# EAGLE board VCA 2164 (EAGLE 9.6.2)
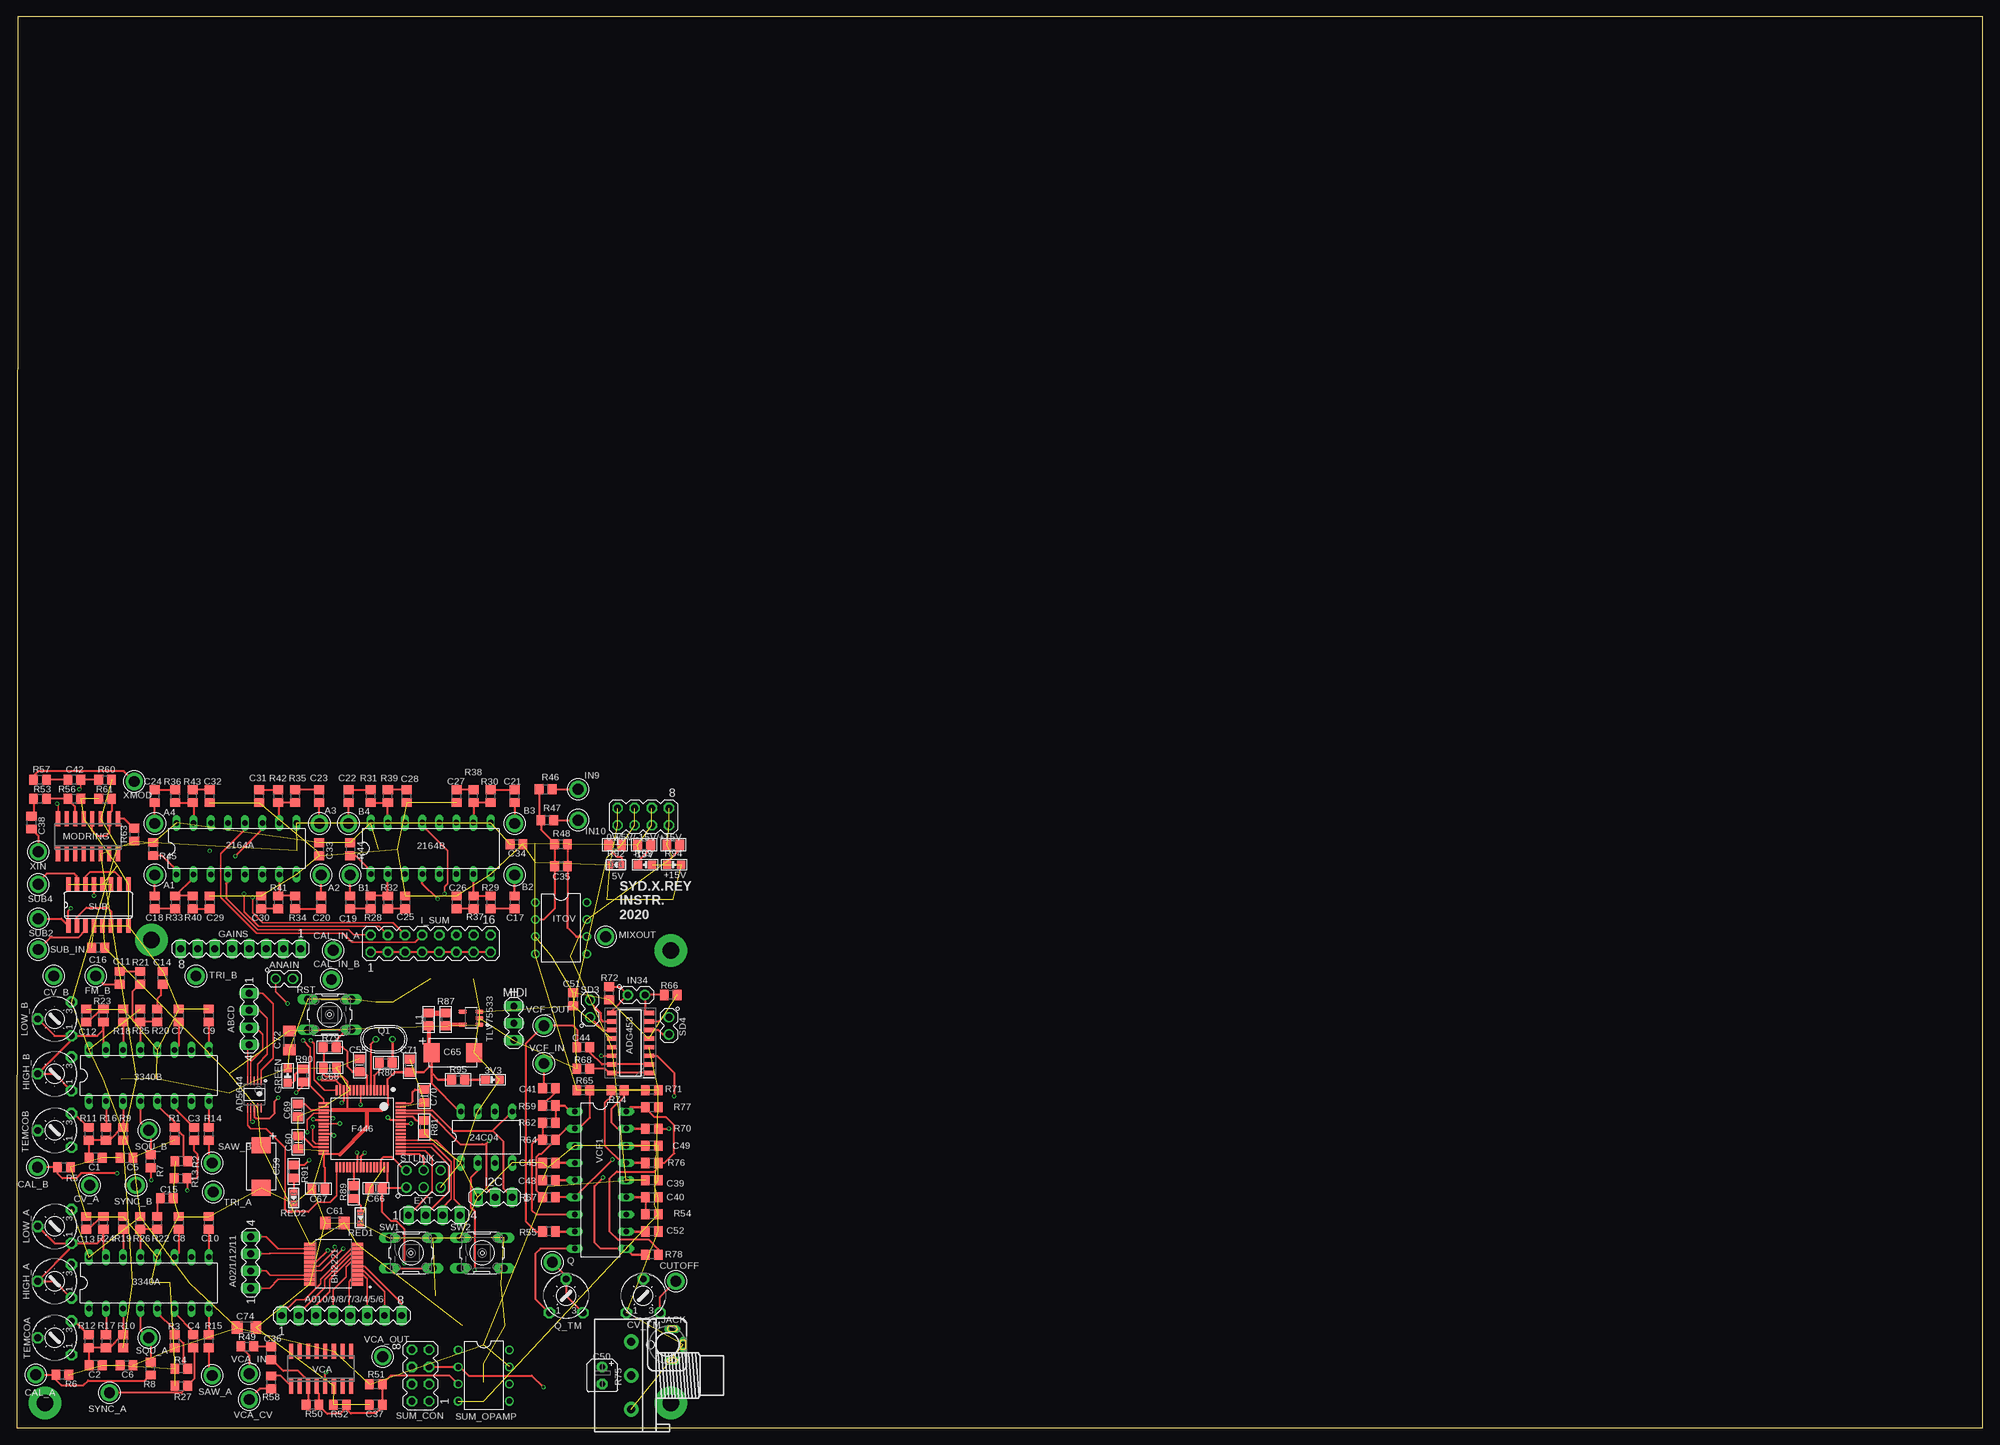
[diagram p0: board, top side]
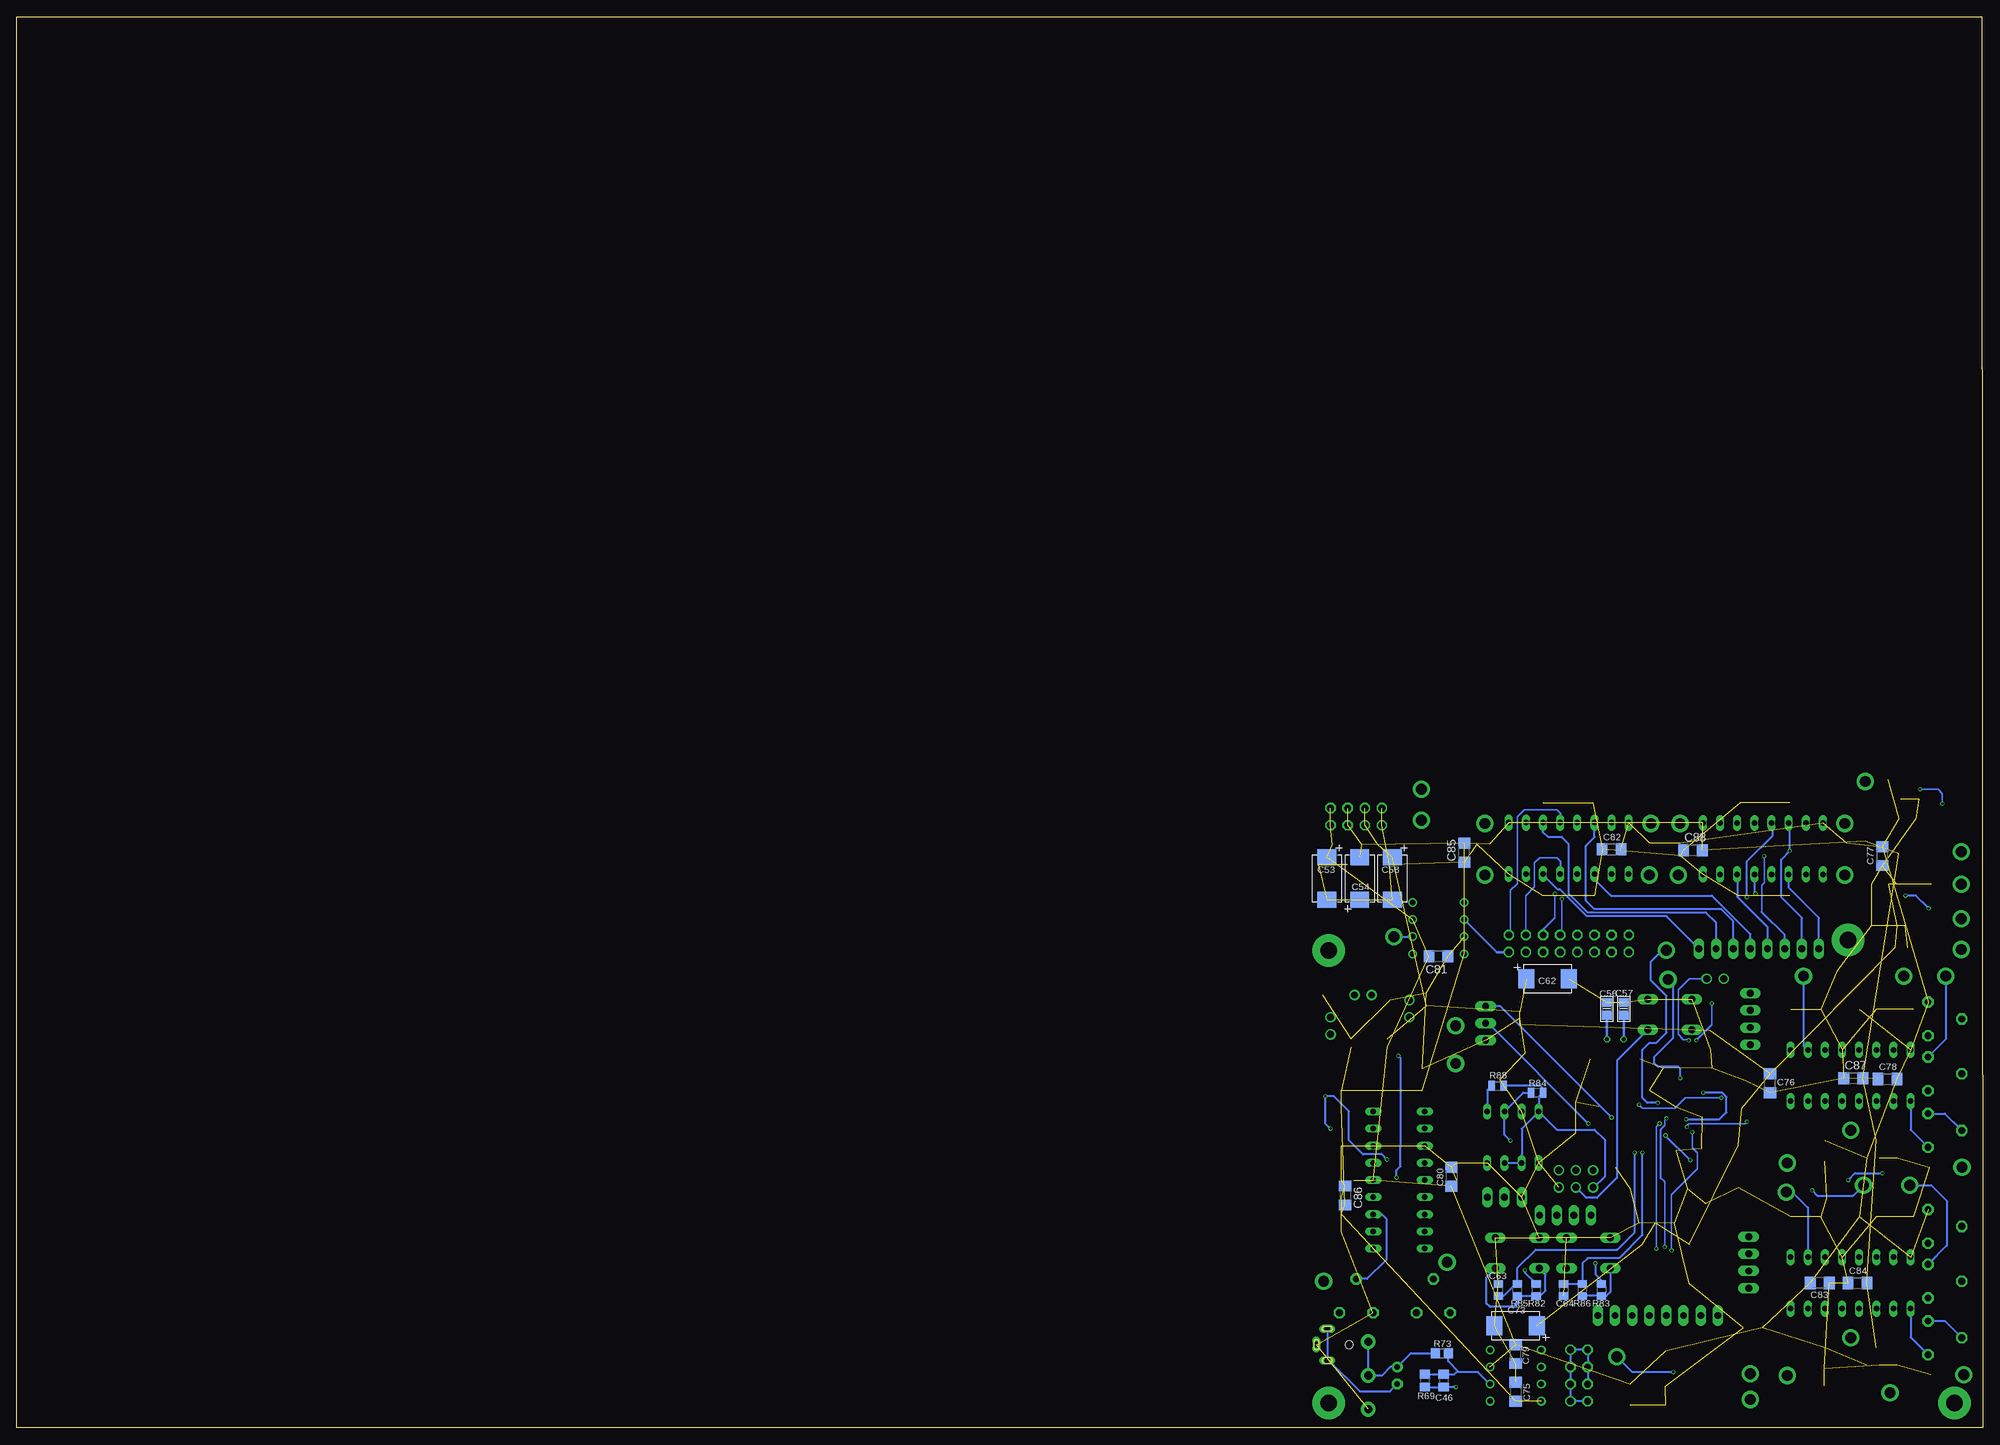
[diagram p1: board, bottom side, seen from below]

Size 291.35 x 209.06 mm. Coordinates in mm from the lower left corner, seen from the top.
Outline: 0,0 291.35,0 291.35,209.06 0.13,209.06 0,0
Copper layers (1*16): Top 0.018mm / dielectric 1.55mm / Bottom 0.018mm
Design rules "eC_2Layer_PClass6_BaseCopperO18_eCDefault": minimum track width 0.15mm, minimum drill 0.35mm, track to track 0.15mm, track to pad 0.15mm, pad to pad 0.15mm, via to via 0.15mm, smd to smd 0mil, copper to edge 0.25mm, drill to drill 0.35mm, minimum pad ring 0.175mm, minimum via ring 0.125mm, stop-mask expansion 0mil, vias tented up to drill 0.45mm, thermal gap 0.2mm

## Footprints (pad centres in the part's own frame; a part is rotated, then mirrored left to right if it is on the bottom)
MA04-2 = drill 1.016 octagon: 1 -3.81,-1.27; 2 -3.81,1.27; 3 -1.27,-1.27; 4 -1.27,1.27; 5 1.27,-1.27; 6 1.27,1.27; 7 3.81,-1.27; 8 3.81,1.27
0805-LED = smd 1.2 x 1.2: A -1.05,0; C 1.05,0
0603-LED = smd 0.8 x 1: A 0.825,0; C -0.825,0
DIL8 = drill 0.813 long: 1 -3.81,-3.81; 2 -1.27,-3.81; 3 1.27,-3.81; 4 3.81,-3.81; 5 3.81,3.81; 6 1.27,3.81; 7 -1.27,3.81; 8 -3.81,3.81
DIL16 = drill 0.813 long: 1 -8.89,-3.81; 2 -6.35,-3.81; 3 -3.81,-3.81; 4 -1.27,-3.81; 5 1.27,-3.81; 6 3.81,-3.81; 7 6.35,-3.81; 8 8.89,-3.81; 9 8.89,3.81; 10 6.35,3.81; 11 3.81,3.81; 12 1.27,3.81; 13 -1.27,3.81; 14 -3.81,3.81; 15 -6.35,3.81; 16 -8.89,3.81
TESTPOINT_63 = drill 1.6 pad 2.54: P$1 0,0
MA04-1 = drill 1.016 long: 1 -3.81,0; 2 -1.27,0; 3 1.27,0; 4 3.81,0
MA08-1 = drill 1.016 long: 1 -8.89,0; 2 -6.35,0; 3 -3.81,0; 4 -1.27,0; 5 1.27,0; 6 3.81,0; 7 6.35,0; 8 8.89,0
ANALOG_DEVICES_AD5644RBRMZ-5_0 = smd 1.45 x 0.25: 1 -2.025,1; 2 -2.025,0.5; 3 -2.025,0; 4 -2.025,-0.5; 5 -2.025,-1; 6 2.025,-1; 7 2.025,-0.5; 8 2.025,0; 9 2.025,0.5; 10 2.025,1
SOIC127P600X175-16N = smd 1.525 x 0.65: 1 -2.712,4.445; 2 -2.712,3.175; 3 -2.712,1.905; 4 -2.712,0.635; 5 -2.712,-0.635; 6 -2.712,-1.905; 7 -2.712,-3.175; 8 -2.712,-4.445; 9 2.712,-4.445; 10 2.712,-3.175; 11 2.712,-1.905; 12 2.712,-0.635; 13 2.712,0.635; 14 2.712,1.905; 15 2.712,3.175; 16 2.712,4.445
MA02-1 = drill 1.016: 1 -2.54,0; 2 0,0
SOP65P780X200-20N = smd 1.9 x 0.48: 1 -3.505,2.925; 2 -3.505,2.275; 3 -3.505,1.625; 4 -3.505,0.975; 5 -3.505,0.325; 6 -3.505,-0.325; 7 -3.505,-0.975; 8 -3.505,-1.625; 9 -3.505,-2.275; 10 -3.505,-2.925; 11 3.505,-2.925; 12 3.505,-2.275; 13 3.505,-1.625; 14 3.505,-0.975; 15 3.505,-0.325; 16 3.505,0.325; 17 3.505,0.975; 18 3.505,1.625; 19 3.505,2.275; 20 3.505,2.925
C0805 = smd 1.3 x 1.5: 1 -0.95,0; 2 0.95,0
B45181A = drill 0.813 pad 1.6: + -1.27,0 | drill 0.813 pad 1.6 octagon: - 1.27,0
CPOL2917 = smd 2.4 x 2.8: + -3.15,0; - 3.15,0
C1206 = smd 1.6 x 1.8: 1 -1.4,0; 2 1.4,0
C0805' = smd 1.016 x 1.422: 1 -0.889,0; 2 0.889,0
6MM = drill 1 pad 1.676 octagon: A -2.5,-2.5; E 2.5,-2.5; S 0,2.5
QFP50P1200X1200X160-64N = smd 1.5 x 0.3: 1 -5.7,3.75; 2 -5.7,3.25; 3 -5.7,2.75; 4 -5.7,2.25; 5 -5.7,1.75; 6 -5.7,1.25; 7 -5.7,0.75; 8 -5.7,0.25; 9 -5.7,-0.25; 10 -5.7,-0.75; 11 -5.7,-1.25; 12 -5.7,-1.75; 13 -5.7,-2.25; 14 -5.7,-2.75; 15 -5.7,-3.25; 16 -5.7,-3.75; 33 5.7,-3.75; 34 5.7,-3.25; 35 5.7,-2.75; 36 5.7,-2.25; 37 5.7,-1.75; 38 5.7,-1.25; 39 5.7,-0.75; 40 5.7,-0.25; 41 5.7,0.25; 42 5.7,0.75; 43 5.7,1.25; 44 5.7,1.75; 45 5.7,2.25; 46 5.7,2.75; 47 5.7,3.25; 48 5.7,3.75 | smd 0.3 x 1.5: 17 -3.75,-5.7; 18 -3.25,-5.7; 19 -2.75,-5.7; 20 -2.25,-5.7; 21 -1.75,-5.7; 22 -1.25,-5.7; 23 -0.75,-5.7; 24 -0.25,-5.7; 25 0.25,-5.7; 26 0.75,-5.7; 27 1.25,-5.7; 28 1.75,-5.7; 29 2.25,-5.7; 30 2.75,-5.7; 31 3.25,-5.7; 32 3.75,-5.7; 49 3.75,5.7; 50 3.25,5.7; 51 2.75,5.7; 52 2.25,5.7; 53 1.75,5.7; 54 1.25,5.7; 55 0.75,5.7; 56 0.25,5.7; 57 -0.25,5.7; 58 -0.75,5.7; 59 -1.25,5.7; 60 -1.75,5.7; 61 -2.25,5.7; 62 -2.75,5.7; 63 -3.25,5.7; 64 -3.75,5.7
HOLES_096-PAD-NS = drill 2.438 pad 4.826: B096 0,0
MA03-1 = drill 1.016 long: 1 -2.54,0; 2 0,0; 3 2.54,0
MA08-2 = drill 1.016 octagon: 1 -8.89,-1.27; 2 -8.89,1.27; 3 -6.35,-1.27; 4 -6.35,1.27; 5 -3.81,-1.27; 6 -3.81,1.27; 7 -1.27,-1.27; 8 -1.27,1.27; 9 1.27,-1.27; 10 1.27,1.27; 11 3.81,-1.27; 12 3.81,1.27; 13 6.35,-1.27; 14 6.35,1.27; 15 8.89,-1.27; 16 8.89,1.27
DIL08 = drill 0.813 pad 1.27: 1 -3.81,-3.81; 2 -1.27,-3.81; 3 1.27,-3.81; 4 3.81,-3.81; 5 3.81,3.81; 6 1.27,3.81; 7 -1.27,3.81; 8 -3.81,3.81
1502_01 = drill 0.8 pad 1.2 long: 1 0,2.35; 2 -2.35,0.75; 3 2.35,0.75 | hole 1.2: 0,-2.5
L0805 = smd 1.3 x 1.5: 1 -0.95,0; 2 0.95,0
SO16 = smd 0.6 x 2.2: 1 -4.445,-2.6; 2 -3.175,-2.6; 3 -1.905,-2.6; 4 -0.635,-2.6; 5 0.635,-2.6; 6 1.905,-2.6; 7 3.175,-2.6; 8 4.445,-2.6; 9 4.445,2.6; 10 3.175,2.6; 11 1.905,2.6; 12 0.635,2.6; 13 -0.635,2.6; 14 -1.905,2.6; 15 -3.175,2.6; 16 -4.445,2.6
Q-HC-46X = drill 0.61: 1 -1.25,0; 2 1.25,0
R0805 = smd 1.3 x 1.5: 1 -0.95,0; 2 0.95,0
3RP/1610N = drill 1.2 pad 2.184: 1 -5,0; 2 0,0; 3 5,0
R0805' = smd 1.016 x 1.422: 1 -0.889,0; 2 0.889,0
B3F-10XX = drill 1.016 long: 1 -3.251,2.261; 2 3.251,2.261; 3 -3.251,-2.261; 4 3.251,-2.261
MA03-2 = drill 1.016: 1 -2.54,-1.27; 2 -2.54,1.27; 3 0,-1.27; 4 0,1.27; 5 2.54,-1.27; 6 2.54,1.27
SO16' = smd 0.66 x 2.032: 1 -4.445,-3.073; 2 -3.175,-3.073; 3 -1.905,-3.073; 4 -0.635,-3.073; 5 0.635,-3.073; 6 1.905,-3.073; 7 3.175,-3.073; 8 4.445,-3.073; 9 4.445,3.073; 10 3.175,3.073; 11 1.905,3.073; 12 0.635,3.073; 13 -0.635,3.073; 14 -1.905,3.073; 15 -3.175,3.073; 16 -4.445,3.073
SOT95P280X145-5N = smd 1.21 x 0.59: 1 -1.255,0.95; 2 -1.255,0; 3 -1.255,-0.95; 4 1.255,-0.95; 5 1.255,0.95
DIL18 = drill 0.813 long: 1 -10.16,-3.81; 2 -7.62,-3.81; 3 -5.08,-3.81; 4 -2.54,-3.81; 5 0,-3.81; 6 2.54,-3.81; 7 5.08,-3.81; 8 7.62,-3.81; 9 10.16,-3.81; 10 10.16,3.81; 11 7.62,3.81; 12 5.08,3.81; 13 2.54,3.81; 14 0,3.81; 15 -2.54,3.81; 16 -5.08,3.81; 17 -7.62,3.81; 18 -10.16,3.81

## Placement (x,y rotation side)
0V/5V/-15V/+15V  [MA04-2]  92.84,90.55 0 top
3V3  [0805-LED]  70.48,51.56 0 top
5V  [0603-LED]  88.77,83.44 0 top
24C04  24C04AP  [DIL8]  69.6,43.05 0 top
2164A  SSM2164  [DIL16]  32.56,85.82 0 top
2164B  SSM2164  [DIL16]  61.34,85.85 0 top
3340A  CEM3340  [DIL16]  19.56,21.46 0 top
3340B  CEM3340  [DIL16]  19.56,52.2 0 top
+15V  [0805-LED]  97.41,83.44 0 top
-15V  [0805-LED]  93.09,83.44 180 top
A1  T  [TESTPOINT_63]  20.45,81.92 0 top
A2  T  [TESTPOINT_63]  45.09,81.92 0 top
A02/1/12/11  [MA04-1]  34.67,24.51 90 top
A3  T  [TESTPOINT_63]  44.83,89.54 0 top
A4  T  [TESTPOINT_63]  20.45,89.54 0 top
A010/9/8/7/3/4/5/6  [MA08-1]  48.13,16.64 0 top
ABCD  [MA04-1]  34.42,60.58 270 top
AD5644  ANALOG_DEVICES_AD5644RBRMZ-5ANALOG_DEVICES_AD5644RBRMZ-5_0_0  [ANALOG_DEVICES_AD5644RBRMZ-5_0]  35.18,49.4 270 top
ADG453  ADG453BRZ  [SOIC127P600X175-16N]  90.93,57.02 180 top
ANAIN  [MA02-1]  40.89,66.55 0 top
B1  T  [TESTPOINT_63]  49.4,81.92 0 top
B2  T  [TESTPOINT_63]  73.79,81.92 0 top
B3  T  [TESTPOINT_63]  73.79,89.54 0 top
B4  T  [TESTPOINT_63]  49.15,89.54 0 top
BH2221  BH2221FV  [SOP65P780X200-20N]  46.96,24.26 180 top
C1  100n  [C0805]  11.68,40 180 top
C2  100n  [C0805]  11.68,9.27 180 top
C3  1n  [C0805]  26.29,43.56 90 top
C4  1n  [C0805]  26.16,12.83 90 top
C5  100n  [C0805]  16.26,40 0 top
C6  100n  [C0805]  16.26,9.27 0 top
C7  1n  [C0805]  24,61.09 270 top
C8  1n  [C0805]  24,30.35 270 top
C9  100n  [C0805]  28.45,61.09 270 top
C10  100n  [C0805]  28.45,30.35 270 top
C11  100n  [C0805]  15.24,66.68 270 top
C12  10n  [C0805]  10.29,61.09 270 top
C13  10n  [C0805]  10.29,30.35 270 top
C14  10n  [C0805]  21.59,66.68 90 top
C15  10n  [C0805]  22.22,34.04 0 top
C16  100n  [C0805]  12.07,71.12 180 top
C17  470n  [C0805]  73.79,77.85 270 top
C18  470n  [C0805]  20.45,77.85 270 top
C19  470n  [C0805]  49.4,77.85 270 top
C20  470n  [C0805]  45.09,77.85 270 top
C21  470n  [C0805]  73.79,93.6 90 top
C22  470n  [C0805]  49.15,93.6 90 top
C23  470n  [C0805]  44.83,93.6 90 top
C24  470n  [C0805]  20.45,93.6 90 top
C25  560p  [C0805]  57.53,77.85 270 top
C26  560p  [C0805]  65.15,77.85 270 top
C27  560p  [C0805]  65.15,93.6 90 top
C28  560p  [C0805]  57.79,93.6 90 top
C29  560p  [C0805]  28.57,77.85 270 top
C30  560p  [C0805]  36.2,77.85 270 top
C31  560p  [C0805]  35.94,93.6 90 top
C32  560p  [C0805]  28.57,93.6 90 top
C33  100n  [C0805]  44.83,85.73 90 top
C34  100n  [C0805]  74.04,86.49 0 top
C35  100p  [C0805]  80.64,83.19 0 top
C36  4.7u  [C0805]  37.72,11.05 90 top
C37  4.7u  [C0805]  53.21,3.43 180 top
C38  4.7u  [C0805]  2.16,89.66 270 top
C39  100n  [C0805]  94.11,36.7 180 top
C40  100n  [C0805]  94.11,34.16 0 top
C41  470n  [C0805]  78.87,50.29 180 top
C42  1u  [C0805]  8.51,96.01 180 top
C43  300p  [C0805]  78.87,36.7 0 top
C44  1u  [C0805]  83.95,56.39 180 top
C45  300p  [C0805]  78.87,39.24 0 top
C46  100p  [C0805]  79.88,6.99 270 bottom
C49  300p  [C0805]  94.11,41.78 180 top
C50  22u  [B45181A]  86.74,7.75 270 top
C51  100n  [C0805]  82.42,63.5 90 top
C52  300p  [C0805]  94.11,29.08 180 top
C53  10u  [CPOL2917]  97.16,81.41 270 bottom
C54  10u  [CPOL2917]  92.33,81.41 90 bottom
C55  0.1uF  [C0805]  50.78,53.7 270 top
C56  12pF  [C0805]  55.69,62.07 270 bottom
C57  12pF  [C0805]  53.19,62.07 270 bottom
C58  10u  [CPOL2917]  87.5,81.41 270 bottom
C59  10u  [CPOL2917]  36.2,38.73 270 top
C60  2.2uF  [C0805]  41.68,42.3 90 top
C61  100n  [C1206]  47.12,30.35 0 top
C62  10u  [CPOL2917]  64.48,66.52 0 bottom
C63  100n  [C0805']  71.75,20.45 90 bottom
C64  100n  [C0805']  62.1,20.45 270 bottom
C65  100 uF  [CPOL2917]  64.61,55.57 0 top
C66  0.1uF  [C0805]  53.2,35.53 0 top
C67  0.1uF  [C0805]  44.69,35.45 0 top
C68  0.1uF  [C0805]  46.4,53.36 180 top
C69  0.1uF  [C0805]  41.6,47.02 90 top
C70  0.1uF  [C0805]  60.38,49.16 90 top
C71  1.0uF  [C0805]  58.24,53.64 270 top
C72  100n  [C1206]  40.39,57.4 90 top
C73  10u  [CPOL2917]  69.21,15.11 180 bottom
C74  1u  [C1206]  34.04,14.86 180 top
C75  1u  [C1206]  69.21,5.33 270 bottom
C76  1u  [C1206]  31.5,51.05 90 bottom
C77  1u  [C1206]  14.86,84.71 90 bottom
C78  1u  [C1206]  14.1,51.69 0 bottom
C79  1u  [C1206]  69.21,10.92 90 bottom
C80  1u  [C1206]  78.74,37.21 270 bottom
C81  1u  [C1206]  80.64,69.85 180 bottom
C82  1u  [C1206]  54.99,85.73 0 bottom
C83  1u  [C1206]  24.13,21.46 180 bottom
C84  1u  [C1206]  18.54,21.46 0 bottom
C85  1u  [C1206]  76.83,85.22 90 bottom
C86  1u  [C1206]  94.49,34.42 270 bottom
C87  1u  [C1206]  19.18,51.82 0 bottom
C88  1u  [C1206]  42.93,85.6 0 bottom
CAL_A  SYNC_IN  [TESTPOINT_63]  2.79,7.87 90 top
CAL_B  CALIB B  [TESTPOINT_63]  3.05,38.61 90 top
CAL_IN_A  [TESTPOINT_63]  46.86,70.74 0 top
CAL_IN_B  [TESTPOINT_63]  46.61,66.42 0 top
CUTOFF  [TESTPOINT_63]  97.66,21.72 0 top
CV_A  CV  [TESTPOINT_63]  10.79,35.94 90 top
CV_B  CV  [TESTPOINT_63]  5.46,66.93 90 top
CV_TM  100k  [6MM]  92.84,19.56 0 top
EXT  [MA04-1]  61.85,31.5 0 top
F446  STM32F446RCT7  [QFP50P1200X1200X160-64N]  51.18,44.32 270 top
FM_B  FMLIN  [TESTPOINT_63]  11.68,66.93 90 top
GAINS  GAIN_CTRL  [MA08-1]  33.15,70.99 180 top
GREEN  [0805-LED]  40.13,52.2 90 top
HIGH_A  100k  [6MM]  5.59,21.72 90 top
HIGH_B  100k  [6MM]  5.59,52.45 90 top
HOLE1  HOLES_MOUNT-PAD-ROUND-0.096-NS  [HOLES_096-PAD-NS]  96.9,70.74 0 top
HOLE2  HOLES_MOUNT-PAD-ROUND-0.096-NS  [HOLES_096-PAD-NS]  4.19,3.68 0 top
HOLE3  HOLES_MOUNT-PAD-ROUND-0.096-NS  [HOLES_096-PAD-NS]  96.9,3.68 0 top
HOLE4  HOLES_MOUNT-PAD-ROUND-0.096-NS  [HOLES_096-PAD-NS]  19.94,72.26 0 top
I2C  [MA03-1]  70.87,34.16 180 top
I_SUM  ITOV  [MA08-2]  61.34,71.76 0 top
IN9  [TESTPOINT_63]  83.19,94.62 0 top
IN10  [TESTPOINT_63]  83.19,90.04 0 top
IN34  IN34  [MA02-1]  93.09,64.14 0 top
ITOV  NE5534AN  [DIL08]  80.64,74.04 270 top
JACK  1502_01  [1502_01]  96.39,12.32 270 top
L1  1 uH  [L0805]  61.06,60.5 270 top
LOW_A  100k  [6MM]  5.59,29.85 90 top
LOW_B  100k  [6MM]  5.59,60.58 90 top
MIDI  [MA03-1]  73.66,59.94 270 top
MIXOUT  [TESTPOINT_63]  87.25,72.77 0 top
MODRING  LM13700M  [SO16]  10.54,87.63 0 top
Q  [TESTPOINT_63]  79.38,24.51 0 top
Q1  16MHz  [Q-HC-46X]  54.44,57.57 180 top
Q_TM  100k  [6MM]  81.41,19.56 0 top
R1  330k  [R0805]  23.37,43.56 270 top
R2  68k  [R0805]  24.38,39.5 180 top
R3  330k  [R0805]  23.37,12.83 270 top
R4  68k  [R0805]  24.38,8.76 180 top
R5  10k  [R0805]  6.98,38.61 0 top
R6  10k  [R0805]  6.73,7.87 0 top
R7  33k  [R0805]  19.81,39.5 90 top
R8  33k  [R0805]  19.81,8.76 90 top
R9  820  [R0805]  15.75,43.56 90 top
R10  820  [R0805]  15.75,12.83 90 top
R11  24k  [R0805]  10.67,43.56 270 top
R12  24k  [R0805]  10.67,12.83 270 top
R13  470k  [R0805]  24.26,36.96 0 top
R14  5.6k  [R0805]  28.45,43.56 90 top
R15  5.6k  [R0805]  28.45,12.83 90 top
R16  5.6k  [R0805]  13.21,43.56 270 top
R17  5.6k  [R0805]  13.21,12.83 270 top
R18  1.8k  [R0805]  15.75,61.09 90 top
R19  1.8k  [R0805]  15.75,30.35 90 top
R20  470  [R0805]  20.83,61.09 90 top
R21  1M  [R0805]  18.29,66.68 90 top
R22  470  [R0805]  20.83,30.35 90 top
R23  470  [R0805]  12.83,61.09 90 top
R24  470  [R0805]  12.83,30.35 90 top
R25  1.5M  [R0805]  18.29,61.09 90 top
R26  1.5M  [R0805]  18.29,30.35 90 top
R27  470k  [R0805]  24.38,6.22 0 top
R28  27k  [R0805]  52.45,77.85 270 top
R29  27k  [R0805]  70.23,77.85 270 top
R30  27k  [R0805]  70.23,93.6 90 top
R31  27k  [R0805]  52.45,93.6 90 top
R32  470  [R0805]  54.99,77.85 270 top
R33  27k  [R0805]  23.49,77.85 270 top
R34  27k  [R0805]  41.28,77.85 270 top
R35  27k  [R0805]  41.28,93.6 90 top
R36  27k  [R0805]  23.49,93.6 90 top
R37  470  [R0805]  67.69,77.85 270 top
R38  470  [R0805]  67.69,93.6 90 top
R39  470  [R0805]  54.99,93.6 90 top
R40  470  [R0805]  26.04,77.85 270 top
R41  470  [R0805]  38.73,77.85 270 top
R42  470  [R0805]  38.73,93.6 90 top
R43  470  [R0805]  26.04,93.6 90 top
R44  8.2k  [R0805]  49.4,85.73 270 top
R45  8.2k  [R0805]  20.18,85.76 270 top
R46  27k  [R0805]  78.36,94.62 0 top
R47  27k  [R0805]  78.61,90.04 0 top
R48  33K  [R0805]  80.64,86.49 0 top
R49  100k  [R0805]  34.16,12.06 0 top
R50  1k  [R0805]  43.82,3.43 0 top
R51  10k  [R0805]  53.21,6.48 0 top
R52  10k  [R0805]  47.88,3.43 180 top
R53  100k  [R0805]  3.43,93.22 0 top
R54  1.5k  [R0805]  94.11,31.62 180 top
R55  51k  [R0805]  78.87,29.08 180 top
R56  1k  [R0805]  8.51,93.22 0 top
R57  4.7k  [R0805]  3.43,96.01 180 top
R58  27k  [R0805]  37.72,6.73 90 top
R59  91k  [R0805]  78.87,47.75 0 top
R60  47k  [R0805]  13.08,96.01 0 top
R61  22k  [R0805]  13.08,93.22 0 top
R62  100k  [R0805]  78.87,45.21 0 top
R63  10k  [R0805]  17.4,87.88 90 top
R64  91k  [R0805]  78.87,42.67 180 top
R65  220k  [R0805]  83.95,50.04 0 top
R66  100k  [R0805]  96.9,64.14 180 top
R67  100k  [R0805]  78.87,34.16 0 top
R68  100k  [R0805]  83.95,53.21 0 top
R69  47k  [R0805]  82.68,6.99 270 bottom
R70  91k  [R0805]  94.11,44.32 0 top
R71  220k  [R0805]  94.11,50.04 180 top
R72  100k  [R0805]  87.76,64.39 270 top
R73  470  [R0805]  80.14,11.05 0 bottom
R74  100k  [R0805]  89.03,50.04 180 top
R75  100kB  [3RP/1610N]  91.06,7.75 90 top
R76  91k  [R0805]  94.11,39.24 180 top
R77  220k  [R0805]  94.11,47.5 180 top
R78  100k  [R0805]  94.11,25.65 180 top
R79  100k  [R0805]  46.36,56.39 0 top
R80  100  [R0805]  54.69,54.07 0 top
R81  10K  [R0805]  60.37,44.57 270 top
R82  10k  [R0805']  66.17,20.45 270 bottom
R83  10k  [R0805']  56.52,20.45 270 bottom
R84  1k  [R0805']  66.04,49.66 0 bottom
R85  10k  [R0805']  68.96,20.45 90 bottom
R86  10k  [R0805']  59.31,20.45 90 bottom
R87  1  [R0805]  63.56,60.5 270 top
R88  1k  [R0805']  71.88,50.67 0 bottom
R89  180  [R0805]  49.91,34.92 270 top
R90  1k  [R0805]  42.42,52.2 90 top
R91  180  [R0805]  41.02,37.97 270 top
R92  470  [R0805]  88.65,86.36 180 top
R93  10k  [R0805]  92.96,86.36 0 top
R94  10k  [R0805]  97.28,86.36 0 top
R95  1k  [R0805]  65.41,51.56 0 top
RED1  [0603-LED]  50.93,31.12 90 top
RED2  [0603-LED]  41.02,34.04 90 top
RST  [B3F-10XX]  46.36,61.21 180 top
SAW_A  S  [TESTPOINT_63]  28.96,7.75 270 top
SAW_B  S  [TESTPOINT_63]  28.96,39.24 270 top
SD3  SD3  [MA02-1]  84.96,63.37 90 top
SD4  SD4  [MA02-1]  96.65,58.29 270 top
SQU_A  P  [TESTPOINT_63]  19.56,13.33 270 top
SQU_B  P  [TESTPOINT_63]  19.56,44.07 270 top
STLINK  75867-331LF  [MA03-2]  60.27,36.89 0 top
SUB  4027D  [SO16']  12.07,77.47 0 top
SUB2  T  [TESTPOINT_63]  3.17,75.44 90 top
SUB4  T  [TESTPOINT_63]  3.17,80.52 90 top
SUB_IN  T  [TESTPOINT_63]  3.17,70.87 90 top
SUM_CON  [MA04-2]  59.82,7.75 90 top
SUM_OPAMP  NE5534AN  [DIL08]  69.21,7.75 270 top
SW1  [B3F-10XX]  58.42,25.91 0 top
SW2  [B3F-10XX]  68.96,25.91 0 top
SYNC_A  SYNC_IN  [TESTPOINT_63]  13.72,5.21 180 top
SYNC_B  SYNC_IN  [TESTPOINT_63]  17.65,35.94 90 top
TEMCOA  10k  [6MM]  5.59,13.33 90 top
TEMCOB  10k  [6MM]  5.59,44.07 90 top
TLV75533  TLV75533PDBVR  [SOT95P280X145-5N]  67.31,60.71 180 top
TRI_A  T  [TESTPOINT_63]  29.08,34.92 180 top
TRI_B  T  [TESTPOINT_63]  26.54,66.93 180 top
VCA  LM13700M  [SO16]  45.09,8.76 0 top
VCA_CV  [TESTPOINT_63]  34.42,4.19 0 top
VCA_IN  [TESTPOINT_63]  34.42,8 0 top
VCA_OUT  [TESTPOINT_63]  54.23,10.54 0 top
VCF1  AS3320  [DIL18]  86.49,36.7 270 top
VCF_IN  [TESTPOINT_63]  78.1,53.97 0 top
VCF_OUT  [TESTPOINT_63]  78.1,59.56 0 top
XIN  [TESTPOINT_63]  3.17,85.34 0 top
XMOD  [TESTPOINT_63]  17.4,95.76 0 top

## Library data of the parts
0V/5V/-15V/+15V A02/1/12/11 A010/9/8/7/3/4/5/6 ABCD EXT GAINS I2C I_SUM MIDI SUM_CON = con-lstb; OC_FARNELL: unknown; OC_NEWARK: unknown
3V3 5V +15V -15V GREEN RED1 RED2 = Passives
24C04 = microchip; MF: RAMTRON INTERNATIONAL CORP; MPN: FM24C04A-P; OC_FARNELL: 1094258; OC_NEWARK: 97H6447
2164A 2164B 3340A 3340B VCF1 = analog-audio-chips
A1-A4 B1-B4 C63 C64 CAL_A CAL_B CAL_IN_A CAL_IN_B CUTOFF CV_A CV_B FM_B IN9 IN10 MIXOUT Q R82-R86 R88 SAW_A SAW_B SQU_A SQU_B SUB2 SUB4 SUB_IN SYNC_A SYNC_B TRI_A TRI_B VCA_CV VCA_IN VCA_OUT VCF_IN VCF_OUT XIN XMOD = 6P1_EVB
AD5644 = Analog Devices - AD5644RBRMZ-5; CIIVA_IDS: 963927; COMPONENT_LINK_1_DESCRIPTION: Manufacturer URL; COMPONENT_LINK_1_URL: http://www.analog.com/en/index.html; COMPONENT_LINK_3_DESCRIPTION: Package Specification; COMPONENT_LINK_3_URL: http://www.analog.com/static/imported-files/packages/PKG_PDF/MSOP%28RM%29/RM_10.pdf; COMPONENT_LINK_4_DESCRIPTION: Product URL; COMPONENT_LINK_4_URL: http://www.analog.com/en/digital-to-analog-converters/da-converters/ad5644r/products/product.html; DAC_OUTPUTS: 4; DATASHEET: http://www.analog.com/static/imported-files/data_sheets/AD5624R_5644R_5664R.pdf; DATASHEET_VERSION: Rev.B; FOOTPRINT_VARIANT_NAME_0: Level C; FOOTPRINT_VARIANT_NAME_1: Level B; FOOTPRINT_VARIANT_NAME_2: Level A; IMPORTED: yes; IMPORTED_FROM: vault; IMPORT_TS: 1521855052; MAX_V: 5.5V; MF: Analog Devices; MOUNTING_TECHNOLOGY: Surface Mount; MPN: AD5644RBRMZ-5; OP_PWR_DISS: 6.6mW; PACKAGE: RM-10; PACKAGE_DESCRIPTION: 10-Lead Mini Small Outline Package [MSOP]; PACKAGE_VERSION: May-2005; PACKING: Tube; PIN_0_0_6_INSIDE_EDGE: clock; PREFIX: U; RELEASE_DATE: 1387041291; RESOLUTION_BITS: 14; ROHS: Yes; SETTLING_TIME: 3.5Âμs; SINGLE_SUPPLY: Yes; VAULT_GUID: 80AB4FD1-89D4-49BA-A3F3-5D59DB24CB1A; VAULT_REVISION: 6F701BB3-0F34-4771-8D13-1575DC664D0F
ADG453 = ADG453BRZ; DESCRIPTION: Analog Devices ADG453BRZ, Analogue SPST Switch Quad SPST, 9 V, 16-Pin SOIC; HEIGHT: 1.75mm; MANUFACTURER_NAME: Analog Devices; MANUFACTURER_PART_NUMBER: ADG453BRZ; MOUSER_PART_NUMBER: 584-ADG453BRZ; MOUSER_PRICE-STOCK: https://www.mouser.com/Search/Refine.aspx?Keyword=584-ADG453BRZ; RS_PART_NUMBER: 0412539P; RS_PRICE-STOCK: http://uk.rs-online.com/web/p/products/0412539P
ANAIN IN34 SD3 SD4 = stm32_pi_board
BH2221 = BH2221FV
C1-C16 C25-C34 C36-C46 C49 C51 C52 C61 C72 C74-C88 = rcl; SPICEPREFIX: C
C17-C24 C35 = rcl; C3: 0.47 micro; SPICEPREFIX: C
C50 = resistor
C53 C54 C58 C59 C62 C65 C73 = MyComponents; MOUSER: 581-TPSE477K010R0200
C55-C57 C60 C66-C71 = MyComponents; MOUSER: 80-C0805C104J5RAUTO
CV_TM HIGH_A HIGH_B LOW_A LOW_B Q_TM TEMCOA TEMCOB = adafruit
F446 = STM32F446RCT7; AVAILABILITY: Unavailable; DESCRIPTION: ARM® Cortex®-M4 STM32F4 Microcontroller IC 32-Bit 180MHz 256KB (256K x 8) FLASH 64-LQFP (10x10); DIGIKEY-PURCHASE-URL: https://snapeda.com/shop?store=DigiKey&id=703054; MF: STMicroelectronics; MP: STM32F446RCT7; PACKAGE: LQFP-64 STMicroelectronics; PRICE: None
HOLE1-HOLE4 = 52101-101-REV-A; BOM: EXCLUDE
ITOV SUM_OPAMP = linear
JACK = con-lumberg; OC_FARNELL: 4739747; OC_NEWARK: unknown
L1 = MyComponents; MOUSER: 963-CKP2012N1R0M-T
MODRING VCA = ota
Q1 = MyComponents; MOUSER: 520-160-20-46X
R1-R74 R76-R78 = rcl; SPICEPREFIX: R
R75 = pot
R79-R81 R87 R89-R95 = MyComponents; MOUSER: 660-RK73H2ATTDD1R00F
RST SW1 SW2 = switch-omron; MPN: B3F-1000; OC_FARNELL: 176432; OC_NEWARK: 36M3542
STLINK = MyComponents; MOUSER: 649-75867-331LF
SUB = 40xx
TLV75533 = TLV75533PDBVR; AVAILABILITY: Unavailable; DESCRIPTION: Linear Voltage Regulator IC 1 Output 500mA SOT-23-5; MF: Texas Instruments; MP: TLV75533PDBVR; PACKAGE: SOT-23 Texas Instruments; PRICE: None

## Nets
3V3: 24C04.2 24C04.3 24C04.8 C65.+ C66.2 C67.2 C68.2 C69.2 C70.2 C71.2 F446.1 F446.13 F446.19 F446.32 F446.48 F446.64 L1.2 R79.1 R82.1 R83.1 R84.2 R88.2 R95.1 STLINK.1
5V: 0V/5V/-15V/+15V.3 0V/5V/-15V/+15V.4 AD5644.9 ADG453.12 BH2221.10 BH2221.11 C16.1 C51.1 C58.+ C59.+ C61.2 C62.+ C72.2 C73.+ C76.2 R92.1 SUB.5 SUB.11 SUB.16 TLV75533.1 TLV75533.3
2164_IN1_MIXA: 2164A.2 R33.1 R40.1
2164_IN2_MIXA: 2164A.7 R34.1 R41.1
2164_IN2_MIXB: 2164B.7 R29.1 R37.1
2164_IN3_MIXA: 2164A.10 R35.1 R42.1
2164_IN3_MIXB: 2164B.10 R30.1 R38.1
2164_IN4_MIXA: 2164A.15 R36.1 R43.1
2164_IN4_MIXB: 2164B.15 R31.1 R39.1
2164_IN4_MIXB1: 2164B.2 R28.1 R32.1
2164_MODE_MIXB: 2164B.1 R44.2
2164_OUT2_MIXA: 2164A.5 I_SUM.4
2164_OUT2_MIXB: 2164B.5 I_SUM.14
2164_OUT3_MIXA: 2164A.12 I_SUM.8
2164_OUT3_MIXB: 2164B.12 I_SUM.16
2164_OUT4_MIXA: 2164A.13 I_SUM.6
2164_OUT4_MIXB: 2164B.13 I_SUM.12
+15V: 0V/5V/-15V/+15V.7 0V/5V/-15V/+15V.8 2164A.16 2164B.16 3340A.16 3340B.16 ADG453.13 C5.2 C6.2 C33.2 C39.2 C53.+ C74.2 C77.2 C78.2 C79.2 C80.2 C81.2 C82.2 C83.2 ITOV.7 LOW_A.E LOW_B.E MODRING.11 R1.2 R3.2 R25.2 R26.2 R44.1 R45.1 R51.1 R60.2 R94.1 SUM_OPAMP.7 VCA.11 VCF1.14
-15V: 0V/5V/-15V/+15V.5 0V/5V/-15V/+15V.6 2164A.9 2164B.9 ADG453.4 C34.1 C54.- C75.2 C84.2 C85.2 C86.2 C87.2 C88.2 ITOV.4 MODRING.6 R9.1 R10.1 R54.1 R63.1 R65.1 R71.1 R77.1 R93.1 SUM_OPAMP.4
AD5644_CLK: AD5644.7 F446.29
AD5644_DI: AD5644.8 F446.9
AD5644_SYNC: AD5644.6 F446.33
BH2221_AO1: A02/1/12/11.2 BH2221.18
BH2221_AO2: A02/1/12/11.1 BH2221.19
BH2221_AO3: A010/9/8/7/3/4/5/6.5 BH2221.2
BH2221_AO4: A010/9/8/7/3/4/5/6.6 BH2221.3
BH2221_AO6: A010/9/8/7/3/4/5/6.8 BH2221.5
BH2221_AO7: A010/9/8/7/3/4/5/6.4 BH2221.6
BH2221_AO8: A010/9/8/7/3/4/5/6.3 BH2221.7
BH2221_AO9: A010/9/8/7/3/4/5/6.2 BH2221.8
BH2221_AO10: A010/9/8/7/3/4/5/6.1 BH2221.9
BH2221_AO11: A02/1/12/11.4 BH2221.12
BH2221_AO12: A02/1/12/11.3 BH2221.13
BH2221_CLK: BH2221.16 F446.21
BH2221_DI: BH2221.17 F446.23
BH2221_LD: BH2221.15 F446.20
BIAS_VCA: C37.1 R50.2 R51.2 R52.1 SUM_OPAMP.3 VCA.4
BOOT1: F446.60 R81.1
CALIB_3340A: CAL_A.P$1 R6.1 R8.1
CALIB_3340B: CAL_B.P$1 R5.1 R7.1
CALIB_IN_3340A: CAL_IN_A.P$1 F446.14
CALIB_IN_3340B: CAL_IN_B.P$1 F446.15
CAP1_VCF: C43.2 VCF1.5
CAP2_VCF: C45.2 VCF1.4
CAP3_VCF: C49.2 VCF1.16
CAP4_VCF: C52.2 VCF1.11
CV_CUTOFF: CUTOFF.P$1 CV_TM.E
CV_FREQ_3340A: CV_A.P$1 HIGH_A.E
CV_FREQ_3340B: CV_B.P$1 HIGH_B.E
CV_PWM_3340A: 3340A.5 R3.1 R4.1
CV_PWM_3340B: 3340B.5 R1.1 R2.1
CV_RES: Q.P$1 Q_TM.E Q_TM.S
CV_VCA: R58.1 VCA_CV.P$1
EXT1: EXT.1 F446.50
EXT2: EXT.2 F446.51
EXT3: EXT.3 F446.52
EXT4: EXT.4 F446.53
FEEDBACK_VCF: ADG453.2 ADG453.15 C44.1
FMLIN_3340B: C11.2 FM_B.P$1
FREQ_CTRL_3340A: 3340A.15 HIGH_A.A HIGH_A.S LOW_A.A LOW_A.S R24.1
FREQ_CTRL_3340B: 3340B.15 HIGH_B.A HIGH_B.S LOW_B.A LOW_B.S R23.1
FREQ_CV_VCF: CV_TM.S VCF1.12
GAIN1_A: 2164A.3 GAINS.8
GAIN1_B: 2164B.3 GAINS.4
GAIN2_A: 2164A.6 GAINS.5
GAIN2_B: 2164B.6 GAINS.1
GAIN3_A: 2164A.11 GAINS.6
GAIN3_B: 2164B.11 GAINS.2
GAIN4_A: 2164A.14 GAINS.7
GAIN4_B: 2164B.14 GAINS.3
GND: 0V/5V/-15V/+15V.1 0V/5V/-15V/+15V.2 3V3.C 5V.C 24C04.1 24C04.4 24C04.7 2164A.8 2164B.8 3340A.12 3340B.12 +15V.C -15V.A AD5644.3 ADG453.5 BH2221.20 C1.1 C2.1 C5.1 C6.1 C7.1 C8.1 C9.1 C10.1 C12.1 C13.1 C14.2 C15.2 C16.2 C25.1 C26.1 C27.1 C28.1 C29.1 C30.1 C31.1 C32.1 C33.1 C34.2 C37.2 C39.1 C40.2 C43.1 C45.1 C49.1 C51.2 C52.1 C53.- C54.+ C55.1 C56.1 C57.1 C58.- C59.- C60.1 C61.1 C62.- C63.2 C64.2 C65.- C66.1 C67.1 C68.1 C69.1 C70.1 C71.1 C72.1 C73.- C74.1 C75.1 C76.1 C77.1 C78.1 C79.1 C80.1 C81.1 C82.1 C83.1 C84.1 C85.1 C86.1 C87.1 C88.1 CV_TM.A F446.12 F446.18 F446.31 F446.47 F446.63 GREEN.C I2C.3 ITOV.3 JACK.1 MIDI.3 MODRING.13 R2.2 R4.2 R5.2 R6.2 R13.1 R18.2 R19.2 R27.1 R52.2 R56.2 R61.1 R66.1 R68.1 R72.2 R75.1 R81.2 RED1.C RED2.C RST.3 RST.4 STLINK.5 SUB.4 SUB.7 SUB.8 SUB.9 SUB.12 SW1.1 SW1.2 SW2.1 SW2.2 TLV75533.2 VCA.6 VCF1.3
HEADIN_OPAMP_OUT: C46.2 R69.2 SUM_CON.1 SUM_CON.2 SUM_CON.3 SUM_CON.4 SUM_CON.5 SUM_CON.6 SUM_CON.7 SUM_CON.8 SUM_OPAMP.2
IN1_MIXERA: A1.P$1 C18.1
IN1_VCF: R59.2 R62.2 VCF1.1
IN2_MIXERA: A2.P$1 C20.1
IN2_MIXERB: B2.P$1 C17.1
IN2_VCF: R64.1 R65.2 R67.1 VCF1.2
IN3_MIXERA: A3.P$1 C23.1
IN3_MIXERB: B3.P$1 C21.1
IN3_VCF: R70.1 R71.2 R74.1 VCF1.17
IN4_MIXERB: B4.P$1 C22.1
IN4_MIXERB1: B1.P$1 C19.1
IN4_VCF: R76.1 R77.2 R78.1 VCF1.18
IN_VCF: C41.2 VCF_IN.P$1
IN_VCFORDER: ADG453.1 ADG453.16 R68.2
IOUT_VCA: VCA.5 VCA_OUT.P$1
ITOV_IN: C35.1 I_SUM.1 I_SUM.3 I_SUM.5 I_SUM.7 I_SUM.9 I_SUM.11 I_SUM.13 I_SUM.15 ITOV.2 R46.1 R47.1 R48.1
LED1_PWM: F446.22 R90.1
LED2_PWM: F446.38 R89.1
LED3_PWM: F446.26 R91.1
LINEAR_CTRL_3340A: 3340A.13 R22.1 R26.1
LINEAR_CTRL_3340B: 3340B.13 R20.1 R21.1 R25.1
N$1: 2164B.4 I_SUM.10
N$2: 3340B.6 C3.2
N$3: SUB.10 SUB.14
N$4: 2164A.4 I_SUM.2
N$5: R82.2 R85.1 SW2.3 SW2.4
N$6: A4.P$1 C24.1
N$7: R83.2 R86.1 SW1.3 SW1.4
N$8: C3.1 R13.2 SYNC_B.P$1
N$9: ADG453.6 SD4.2
N$10: C25.2 R32.2
N$11: C19.2 R28.2
N$12: MODRING.14 R53.2 R56.1
N$13: C36.2 R49.2
N$14: IN9.P$1 R46.2
N$15: IN10.P$1 R47.2
N$16: ADG453.7 SD4.1
N$17: R58.2 VCA.1
N$18: ADG453.11 SD3.1
N$20: C26.2 R37.2
N$22: C27.2 R38.2
N$23: A010/9/8/7/3/4/5/6.7 BH2221.4
N$24: C28.2 R39.2
N$34: ABCD.1 AD5644.1
N$35: ABCD.2 AD5644.2
N$36: ADG453.10 SD3.2
N$37: ADG453.9 IN34.1 R72.1
N$38: 2164A.1 R45.2
N$39: ABCD.3 AD5644.4
N$40: ABCD.4 AD5644.5
N$41: SUB.2 SUB.6
N$43: C38.1 R53.1
N$44: MODRING.9 R63.2
N$45: C42.1 MODRING.16 R60.1
N$46: C42.2 R57.1
N$47: C36.1 R50.1 VCA.3
N$48: R89.2 RED1.A
N$49: R57.2 XMOD.P$1
N$50: C38.2 XIN.P$1
N$51: MODRING.10 MODRING.12 R61.2
N$52: R91.2 RED2.A
N$53: 5V.A R92.2
N$54: -15V.C R93.2
N$55: +15V.A R94.2
N$56: GREEN.A R90.2
N$57: 3V3.A R95.2
N$58: ANAIN.2 F446.16
N$59: ANAIN.1 F446.17
N$65: C21.2 R30.2
N$69: C17.2 R29.2
N$70: C22.2 R31.2
N$74: C30.2 R41.2
N$75: C29.2 R40.2
N$76: C31.2 R42.2
N$77: C32.2 R43.2
N$78: C18.2 R33.2
N$79: C23.2 R35.2
N$80: C20.2 R34.2
N$81: C24.2 R36.2
N$104: C56.2 Q1.1 R80.2
N$108: R87.2 TLV75533.5
N$109: L1.1 R87.1
N$116: C41.1 R59.1
N$171: C12.2 R23.2
N$172: C14.1 R20.2
N$173: 3340B.1 TEMCOB.A
N$174: R11.1 TEMCOB.E TEMCOB.S
N$175: C11.1 R21.2
N$176: 3340B.8 R14.2
N$301: C13.2 R24.2
N$302: C15.1 R22.2
N$303: 3340A.1 TEMCOA.A
N$304: R12.1 TEMCOA.E TEMCOA.S
N$306: 3340A.8 R15.2
N$307: 3340A.6 C4.2
NRST: C55.2 F446.7 R79.2 RST.1 RST.2 STLINK.3
OSC_IN: F446.5 R80.1
OSC_OUT: C57.2 F446.6 Q1.2
OUT1_VCF: R62.1 R64.2 VCF1.7
OUT2_VCF: ADG453.3 R67.2 R70.2 VCF1.6
OUT3_VCF: R74.2 R76.2 VCF1.15
OUT4_VCF: ADG453.14 R78.2 VCF1.10
OUT_JACK: C50.- JACK.2 JACK.3
OUT_MIXER: C35.2 ITOV.6 MIXOUT.P$1 R48.2
OUT_OPAMP: C46.1 R69.1 R73.2 SUM_OPAMP.6
OUT_POT: C50.+ R73.1 R75.2 R75.3
OUT_VCF: C44.2 R55.2 VCF_OUT.P$1
PULSE_3340A: 3340A.4 R8.2 SQU_A.P$1
PULSE_3340B: 3340B.4 R7.2 SQU_B.P$1
RES_CUR_IN_VCF: R55.1 VCF1.8
RES_CUR_VCF: Q_TM.A VCF1.9
SAW_3340A: R15.1 SAW_A.P$1
SAW_3340B: R14.1 SAW_B.P$1
SCALE_3340A: 3340A.14 R19.1
SCALE_3340B: 3340B.14 R18.1
SCL: 24C04.6 F446.61 I2C.2 R84.1
SDA: 24C04.5 F446.62 I2C.1 R88.1
SOFT_SYNC_3340A: 3340A.9 C10.2
SOFT_SYNC_3340B: 3340B.9 C9.2
SUB_IN: SUB.3 SUB_IN.P$1
SUB_OUT2: SUB2.P$1 SUB.1 SUB.13
SUB_OUT4: SUB4.P$1 SUB.15
SW1: C63.1 F446.40 R85.2
SW2: C64.1 F446.39 R86.2
SWCLK: F446.49 STLINK.4
SWDIO: F446.46 STLINK.2
SYNC_3340A: C4.1 R27.2 SYNC_A.P$1
TEMPCO2_VCOA: 3340A.2 R17.1
TEMPCO2_VCOB: 3340B.2 R16.1
TIMING_CAP_3340A: 3340A.11 C8.2
TIMING_CAP_3340B: 3340B.11 C7.2
TRI_3340A: 3340A.10 TRI_A.P$1
TRI_3340B: 3340B.10 TRI_B.P$1
USART1_RX: F446.59 MIDI.1
USART1_TX: F446.58 MIDI.2
VCA_IN: R49.1 VCA_IN.P$1
VCAP1: C60.2 F446.30
VCF_ANASW_IN4: ADG453.8 IN34.2 R66.2
VEE_VCF: C40.1 R54.2 VCF1.13
VEE_VCOA: 3340A.3 C2.2 R10.2 R12.2 R17.2
VEE_VCOB: 3340B.3 C1.2 R9.2 R11.2 R16.2

## Tracks (layer width: path | path; a pad name or v marks a point on that pad's centre or on a via)
3V3  (via drill 0.35)
  Top 0.305: 54.93,47.92 F446.1 54.93,51.63 | F446.64 58.36,48.07 58.67,48.39 58.67,49.78 59,50.11 C70.2 60.48,50.11 | R79.1 45.45,56.34 C68.2 45.45,52.34 45.72,52.07 48.22,52.07 48.93,51.36 F446.13 48.93,47.1 48.9,47.07 | F446.32 | C66.2 54.15,35.63 54.93,36.4 F446.48 | C69.2 42.7,47.97 43.61,47.07 F446.19 46.86,47.07 | 61.46,51.09 61.45,51.08 | STLINK.1 57.64,35.53 C66.2 | v57.4,24.38 57.4,29.46 56.25,30.61 55.5,30.61 54.15,31.95 C66.2 | F446.32 47.82,40.57 47.88,40.51 | C67.2 45.64,38.59 45.48,38.75 F446.32 | 24C04.2 68.33,38.1 67.26,37.04 67.26,32.69 67.82,32.13 v67.82,23.37 | C65.+ 61.46,53.84
  Top 0.406: 54.93,51.63 55.99,52.69 C71.2 60.31,52.69 61.46,53.84 | C65.+ 61.46,52.58 | 61.46,52.58 61.46,51.09 | 60.48,50.11 61.45,51.08 65.66,46.86 24C04.8 | R95.1 62.47,51.56 61.46,52.58
  Top 0.61: 54.93,47.92 54.07,47.07 51.94,47.07 | 51.94,47.07 48.9,47.07 46.86,47.07 | L1.2 61.06,55.97 C65.+ | 51.94,47.07 51.94,44.58 47.88,40.51
  Bottom 0.305: 24C04.8 65.79,49.02 R84.2 65.15,50.29 65.53,50.67 R88.2 | 24C04.8 68.33,44.32 24C04.2 24C04.3 | v57.4,24.38 57.4,22.73 56.52,21.84 R83.1 | v67.82,23.37 67.82,22.99 R82.1 | STLINK.1 57.59,35.62 56.01,37.21 56.01,42.67 57.53,44.2 63.12,44.2 24C04.8
5V  (20 unrouted)
2164_IN1_MIXA
  Top 0.305: R40.1 R33.1 26.21,81.51 2164A.2
2164_IN2_MIXA
  Top 0.305: R34.1 R41.1 38.91,78.97 2164A.7
2164_IN2_MIXB
  Top 0.305: R29.1 R37.1 2164B.7
2164_IN3_MIXA
  Top 0.305: R35.1 R42.1 38.91,92.48 2164A.10
2164_IN3_MIXB
  Top 0.305: R30.1 R38.1 2164B.10
2164_IN4_MIXA
  Top 0.305: R36.1 R43.1 26.21,92.48 2164A.15
2164_IN4_MIXB
  Top 0.305: R31.1 R39.1 2164B.15
2164_IN4_MIXB1
  Top 0.305: R28.1 R32.1 2164B.2
2164_MODE_MIXB
  Top 0.305: R44.2 50.2,84.78 52.45,82.53 2164B.1
2164_OUT2_MIXA  (via drill 0.35)
  Top 0.254: I_SUM.4 53.72,74.3 35.82,74.3 33.66,76.46 v33.66,79.12
  Bottom 0.305: 2164A.5 33.83,79.29 v33.66,79.12
2164_OUT2_MIXB
  Bottom 0.254: I_SUM.14 67.69,78.87 66.42,80.14 66.42,83.69 65.66,84.45 63.12,84.45 62.61,83.95
  Bottom 0.305: 62.61,83.95 2164B.5
2164_OUT3_MIXA
  Top 0.254: 33.66,88.52 30.2,85.07 30.2,78.63 35.55,73.28 48.39,73.28 49.71,71.96 59.01,71.96 I_SUM.8
  Top 0.305: 2164A.12 33.83,88.69 33.66,88.52
2164_OUT3_MIXB
  Bottom 0.254: I_SUM.16 69.98,73.28 69.98,79.63 68.96,80.65 68.96,90.55 67.94,91.57 63.12,91.57 62.61,91.06
  Bottom 0.305: 62.61,91.06 2164B.12
2164_OUT4_MIXA  (via drill 0.35)
  Top 0.254: I_SUM.6 55.75,74.8 36.47,74.8 34.93,76.34 v34.93,78.61
  Bottom 0.305: v34.93,78.61 34.93,83.95 31.11,87.76 31.11,89.46 2164A.13
2164_OUT4_MIXB  (via drill 0.35)
  Top 0.254: v63.37,79.12 63.37,80.14 63.88,80.65 63.88,85.47 60.07,89.28
  Top 0.305: 2164B.13 60.07,89.28
  Bottom 0.254: I_SUM.12 65.15,73.79 63.37,75.56 v63.37,79.12
+15V  (35 unrouted)
-15V  (23 unrouted)
AD5644_CLK  (via drill 0.35)
  Top 0.254: AD5644.7 34.68,45.59 v34.93,45.34 | v43.82,44.58 43.82,42.54 44.29,42.07 F446.29
  Bottom 0.254: v34.93,45.34 35.18,45.09 43.56,45.09 43.82,44.83 v43.82,44.58
AD5644_DI  (via drill 0.35)
  Top 0.254: v50.93,47.88 F446.9
  Top 0.305: AD5644.8 35.18,46.1 35.43,45.85 37.47,45.85 38.23,46.61 38.23,48.39 v38.73,48.89
  Bottom 0.254: v38.73,48.89 41.28,48.89 44.07,48.89 45.59,47.37 50.42,47.37 v50.93,47.88
AD5644_SYNC
  Top 0.254: F446.33 47.43,34.42 46.41,33.4 44.58,33.4 | AD5644.6 34.18,44.83 34.69,44.32 36.96,44.32 39.75,41.53 39.75,34.16
  Top 0.305: 44.58,33.4 43.18,32 40.13,32 39.75,32.38 39.75,34.16
BH2221_AO1
  Top 0.254: BH2221.18 37.57,22.63 36.96,23.24 A02/1/12/11.2
BH2221_AO2
  Top 0.254: BH2221.19 38.75,21.98 37.47,20.7 A02/1/12/11.1
BH2221_AO3
  Top 0.254: A010/9/8/7/3/4/5/6.5 49.4,16.89 49.24,17.05 49.24,21.65 49.57,21.98 BH2221.2
BH2221_AO4
  Top 0.254: BH2221.3 51.37,22.63 51.94,22.05 A010/9/8/7/3/4/5/6.6
BH2221_AO6
  Top 0.254: BH2221.5 51.56,23.93 57.02,18.47 A010/9/8/7/3/4/5/6.8
BH2221_AO7
  Top 0.254: BH2221.6 49.57,24.58 48.82,23.83 48.82,22.4 46.86,20.45 A010/9/8/7/3/4/5/6.4
BH2221_AO8
  Top 0.254: BH2221.7 49.57,25.23 46.33,21.99 46.33,20.17 44.32,18.16 A010/9/8/7/3/4/5/6.3
BH2221_AO9
  Top 0.254: BH2221.8 49.57,25.88 45.63,21.94 45.63,20.73 41.78,16.89 A010/9/8/7/3/4/5/6.2
BH2221_AO10
  Top 0.254: BH2221.9 49.57,26.53 45.02,21.98 45.02,21.34 42.68,19.01 41.36,19.01 39.24,16.89 A010/9/8/7/3/4/5/6.1
BH2221_AO11
  Top 0.254: BH2221.12 38.75,26.53 36.96,28.32 A02/1/12/11.4
BH2221_AO12
  Top 0.254: BH2221.13 37.57,25.88 37.47,25.78 A02/1/12/11.3
BH2221_CLK  (via drill 0.35)
  Top 0.254: BH2221.16 44.76,23.93 47.12,26.29 v47.12,26.8 | v46.86,45.85 46.64,46.07 F446.21
  Bottom 0.254: v46.86,45.85 47.12,45.59 47.12,44.83 | 47.12,36.45 v47.12,26.8
  Bottom 0.305: 47.12,44.83 47.75,44.2 47.75,37.08 47.12,36.45
BH2221_DI  (via drill 0.35)
  Top 0.254: BH2221.17 45.13,23.28 v48.39,26.54 | v47.88,45.09 v47.87,45.07 F446.23
  Bottom 0.254: v47.88,45.09 48.39,44.58 v48.39,26.54
BH2221_LD  (via drill 0.35)
  Top 0.254: BH2221.15 44.39,24.58 v46.1,26.29 | F446.20 43.98,46.57 43.05,45.65 v43.05,43.81
  Bottom 0.254: v43.05,43.81 43.05,41.53 42.29,40.77 42.29,38.35 46.1,34.54 v46.1,26.29
BIAS_VCA
  Top 0.305: 48.73,2.87 49.48,2.12 53.21,2.12 54.06,2.97 C37.1 R51.2 55.43,7.75 64.13,7.75 SUM_OPAMP.3 | R52.1 48.73,3.38 48.98,3.12 48.73,2.87 | 48.73,2.87 47.93,2.07 46.03,2.07 44.77,3.33 R50.2 44.77,5.05 44.45,5.36 VCA.4
BOOT1
  Top 0.305: R81.1 59.26,45.52 58.7,46.07 F446.60
CALIB_3340A
  Top 0.305: CAL_A.P$1 R6.1 5.78,7.11 6.58,6.31 9.87,6.31 10.54,6.99 18.98,6.99 R8.1
CALIB_3340B  (via drill 0.35)
  Top 0.305: CAL_B.P$1 R5.1 6.04,37.65 6.73,36.96 8.76,36.96 9.53,37.72 v14.86,37.72 | R7.1 19.81,36.83 v19.94,36.7
  Bottom 0.305: v19.94,36.7 18.92,37.72 v14.86,37.72
CALIB_IN_3340A  (via drill 0.35)
  Top 0.305: F446.14 48.43,48.43 v48.13,48.13
  Bottom 0.305: v48.13,48.13 49.66,48.13 50.42,48.89 50.42,56.01 49.4,57.02 48.39,57.02 46.86,58.55 46.86,64.01 49.15,66.29 49.15,69.09 47.5,70.74 CAL_IN_A.P$1
CALIB_IN_3340B  (via drill 0.35)
  Top 0.305: v44.83,51.82 45.21,51.43 47.35,51.43 47.93,50.85 F446.15
  Bottom 0.305: v44.83,51.82 44.83,53.21 45.09,53.47 48.13,53.47 48.64,53.97 48.64,54.99 45.85,57.78 45.85,65.66 CAL_IN_B.P$1
CAP1_VCF
  Top 0.406: VCF1.5 C43.2
CAP2_VCF
  Top 0.406: VCF1.4 C45.2
CAP3_VCF
  Top 0.406: C49.2 VCF1.16
CAP4_VCF
  Top 0.406: VCF1.11 C52.2
CV_CUTOFF
  Top 0.305: CV_TM.E 95.34,19.39 CUTOFF.P$1
CV_FREQ_3340A
  Bottom 0.305: CV_A.P$1 7.62,35.94 5.29,33.61 5.29,27.01 HIGH_A.E
CV_FREQ_3340B
  Bottom 0.305: CV_B.P$1 5.46,57.58 HIGH_B.E
CV_PWM_3340A
  Top 0.305: 3340A.5 20.83,17.04 23.37,14.5 R3.1 23.47,13.78 24.68,12.56 24.68,9.41 R4.1
CV_PWM_3340B
  Top 0.305: 3340B.5 20.83,47.78 23.37,45.24 R1.1 23.47,44.51 24.68,43.29 24.68,40.15 R2.1
CV_RES
  Top 0.305: Q_TM.E 81.41,19.56 Q_TM.S 81.41,22.48 Q.P$1
CV_VCA
  Top 0.305: R58.1 36.01,5.78 VCA_CV.P$1
EXT1
  Top 0.254: F446.50 60.5,41.07 61.57,40 61.57,35.02 EXT.1
EXT2
  Top 0.254: EXT.2 60.58,31.54 63.98,34.94 63.98,38.98 61.38,41.57 F446.51
EXT3
  Top 0.254: EXT.3 63.12,32.64 64.38,33.9 64.38,39.4 61.71,42.07 F446.52
EXT4
  Top 0.254: F446.53 62.16,42.57 64.79,39.95 64.79,33.89 65.66,33.02 EXT.4
FEEDBACK_VCF
  Top 0.305: C44.1 84.9,55.65 86.7,53.85 ADG453.15 ADG453.2
FMLIN_3340B
  Top 0.305: FM_B.P$1 12.89,65.73 C11.2
FREQ_CTRL_3340A
  Top 0.305: 3340A.15 12.83,25.65 R24.1 12.83,28.23 11.94,27.35 LOW_A.A | LOW_A.A 8.09,26.72 HIGH_A.S 5.59,21.72 HIGH_A.A | LOW_A.S 5.59,27.35 LOW_A.A
FREQ_CTRL_3340B
  Top 0.305: 3340B.15 12.83,56.39 R23.1 12.83,58.97 11.94,58.08 LOW_B.A | LOW_B.A 8.09,57.45 HIGH_B.S 5.59,52.45 HIGH_B.A | LOW_B.S 5.59,58.08 LOW_B.A
FREQ_CV_VCF
  Bottom 0.305: VCF1.12 89.03,31.62 88.39,30.99 88.39,24.89 91.23,22.06 CV_TM.S
GAIN1_A
  Bottom 0.305: GAINS.8 24.26,75.56 28.75,80.05 2164A.3
GAIN1_B
  Bottom 0.305: GAINS.4 34.42,73.16 40.12,78.87 55.09,78.87 57.39,81.17 57.53,81.31 2164B.3
GAIN2_A
  Bottom 0.305: GAINS.5 31.88,74.2 36.37,78.69 2164A.6
GAIN2_B
  Bottom 0.305: GAINS.1 46.86,75.82 58.68,75.82 62.67,79.81 63.05,79.81 65.15,81.92 2164B.6
GAIN3_A  (via drill 0.35)
  Top 0.254: 36.2,88.52 v32.39,84.71
  Top 0.305: 2164A.11 36.37,88.69 36.2,88.52
  Bottom 0.254: v32.39,84.71 32.39,80.73 32.73,80.39 32.73,76.42
  Bottom 0.305: GAINS.6 29.34,73.03 32.73,76.42
GAIN3_B
  Bottom 0.305: GAINS.2 39.5,74.8 41.02,76.33 58.55,76.33 61.34,79.12 61.34,86.49 62.36,87.5 64.39,87.5 65.15,88.27 2164B.11
GAIN4_A  (via drill 0.35)
  Bottom 0.305: GAINS.7 26.8,75.56 29.84,78.61 29.84,84.2 v28.57,85.47 28.57,89.46 2164A.14
GAIN4_B
  Bottom 0.305: GAINS.3 36.96,75.06 38.73,76.84 57.53,76.84 58.8,78.11 58.8,86.23 57.53,87.5 2164B.14
GND  (127 unrouted)
HEADIN_OPAMP_OUT  (via drill 0.35)
  Top 0.305: SUM_CON.5 SUM_OPAMP.2 65.66,9.02 66.93,7.75 76.33,7.75 v78.04,6.04
  Bottom 0.305: R69.2 C46.2 v78.04,6.04 | SUM_CON.4 SUM_CON.6 SUM_CON.8 SUM_CON.7 SUM_CON.5 SUM_CON.3 SUM_CON.1 SUM_CON.2
IN1_MIXERA
  Top 0.305: C18.1 A1.P$1
IN1_VCF
  Top 0.305: R59.2 R62.2
  Top 0.406: VCF1.1 82.07,46.86 81.18,47.75 R59.2
IN2_MIXERA
  Top 0.305: C20.1 A2.P$1
IN2_MIXERB
  Top 0.305: C17.1 B2.P$1
IN2_VCF
  Top 0.305: R65.2 84.9,45.93 83.29,44.32 VCF1.2 81.37,44.32 79.82,42.77 R64.1 77.7,40.55 77.4,40.55 76.96,40.12 76.96,35.21 77.92,34.26 R67.1
IN3_MIXERA
  Top 0.305: A3.P$1 C23.1
IN3_MIXERB
  Top 0.305: C21.1 B3.P$1
IN3_VCF
  Top 0.305: R71.2 R74.1 89.98,49.08 88.14,47.24 88.14,45.21 89.03,44.32 VCF1.17
  Top 0.406: R70.1 VCF1.17
IN4_MIXERB
  Top 0.305: B4.P$1 C22.1
IN4_MIXERB1
  Top 0.305: C19.1 B1.P$1
IN4_VCF
  Top 0.305: R77.2 93.16,47.4 94.54,46.02 96.21,46.02 97.41,44.82 97.41,40.68 95.97,39.24 R76.1 95.06,38.54 94.49,37.97 88.9,37.97 87.88,36.96 87.88,29.08 89.12,27.85 93.68,27.85 95.06,26.47 R78.1
  Top 0.406: R77.2 90.93,47.5 VCF1.18
IN_VCF
  Top 0.305: C41.2 78.1,50.48 VCF_IN.P$1
IN_VCFORDER
  Top 0.305: R68.2 87.15,53.21 87.78,52.58 ADG453.16 ADG453.1
IOUT_VCA  (via drill 0.35)
  Top 0.305: VCA.5 45.72,8.13 v45.85,8.25
  Bottom 0.305: v45.85,8.25 51.94,8.25 VCA_OUT.P$1
ITOV_IN
  Top 0.305: R46.1 77.41,90.3 R47.1 77.66,88.62 79.69,86.59 R48.1 C35.1 79.69,76.9 78.1,75.31 ITOV.2 | I_SUM.1 I_SUM.3 I_SUM.5 I_SUM.7 I_SUM.9 I_SUM.11 I_SUM.13 I_SUM.15
  Bottom 0.406: I_SUM.15 72.01,70.48 ITOV.2
LED1_PWM  (via drill 0.35)
  Top 0.305: F446.22 44.09,45.57 v43.94,45.72 | v41.4,49.66 42.42,50.67 R90.1
  Bottom 0.305: v43.94,45.72 38.99,45.72 37.97,46.74 37.97,49.02 38.61,49.66 v41.4,49.66
LED2_PWM
  Top 0.305: F446.38 49.93,35.89 R89.1
LED3_PWM  (via drill 0.35)
  Top 0.305: F446.26 46.72,43.57 v46.99,43.31 | v43.32,39.67 42.57,38.92 R91.1
  Bottom 0.305: v46.99,43.31 43.35,39.67 v43.32,39.67
LINEAR_CTRL_3340A
  Top 0.305: 3340A.13 R26.1 R22.1
LINEAR_CTRL_3340B
  Top 0.305: R25.1 3340B.13 | R21.1 18.19,65.73 17.11,64.65 17.11,60.71 17.68,60.14 R25.1 | R20.1 R25.1
N$1  (via drill 0.35)
  Top 0.254: v62.36,78.36 60.07,80.65
  Top 0.305: 60.07,80.65 2164B.4
  Bottom 0.254: I_SUM.10 62.36,73.28 v62.36,78.36
N$2
  Top 0.305: 3340B.6 23.37,47.78 23.37,47.33 26.19,44.51 C3.2
N$3
  Top 0.305: SUB.10 15.24,81.66 14.61,82.3 10.79,82.3 10.16,81.66 SUB.14
N$4
  Top 0.254: I_SUM.2 49.91,73.03 49.15,73.79 35.69,73.79 31.11,78.36
  Top 0.305: 2164A.4 31.29,80.94 30.99,80.65 30.99,78.49 31.11,78.36
N$5
  Bottom 0.305: SW2.4 73.53,22.33 73.53,18.42 73.02,17.91 69.47,17.91 68.96,18.42 R85.1 R82.2 65.53,19.56 64.77,20.32 64.77,22.71 SW2.3
N$6
  Top 0.305: A4.P$1 C24.1
N$7
  Top 0.305: SW1.3 SW1.4
  Bottom 0.305: SW1.3 55.17,20.14 55.75,19.56 R83.2 R86.1
N$8  (via drill 0.35)
  Top 0.305: v25.27,35.18 25.27,36.89 R13.2 26.54,36.96 26.8,37.21 26.8,40.51 26.29,41.02 C3.1
  Bottom 0.305: v25.27,35.18 24.51,34.42 19.18,34.42 SYNC_B.P$1
N$9
  Top 0.305: SD4.2 95.73,58.29 95.1,58.93 ADG453.6
N$10
  Top 0.305: C25.2 R32.2
N$11
  Top 0.305: R28.2 C19.2
N$12
  Top 0.305: MODRING.14 8.64,92.04 7.56,93.12 R56.1 R53.2
N$13
  Top 0.305: C36.2 35.18,12 R49.2
N$14
  Top 0.305: R46.2 IN9.P$1
N$15
  Top 0.305: R47.2 IN10.P$1
N$16
  Top 0.305: SD4.1 95.73,60.83 95.1,60.2 ADG453.7
N$17
  Top 0.305: VCA.1 39.12,7.68 R58.2
N$18
  Top 0.305: SD3.1 86.87,58.93 ADG453.11
N$20
  Top 0.305: R37.2 C26.2
N$22
  Top 0.305: R38.2 C27.2
N$23
  Top 0.254: BH2221.4 51.37,23.28 54.48,20.17 A010/9/8/7/3/4/5/6.7
N$24
  Top 0.305: C28.2 R39.2
N$34
  Top 0.254: AD5644.1 36.18,52.94 37.97,54.74 37.97,62.86 36.45,64.39 ABCD.1
N$35
  Top 0.254: ABCD.2 35.94,61.85 37.11,60.68 37.11,55.33 35.68,53.9 AD5644.2
N$36
  Top 0.305: SD3.2 84.96,63.02 86.56,61.42 86.56,60.5 86.87,60.2 ADG453.10
N$37
  Top 0.305: R72.1 89.35,65.34 IN34.1 88.22,61.8 ADG453.9
N$38
  Top 0.305: R45.2 21.48,84.81 23.67,82.62 2164A.1
N$39
  Top 0.254: AD5644.4 34.68,54.24 36.45,56.01 36.45,58.29 35.43,59.31 ABCD.3
N$40
  Top 0.254: AD5644.5 34.18,56.53 ABCD.4
N$41
  Top 0.305: SUB.2 8.89,75.66 10.28,77.06 13.46,77.06 13.97,76.54 SUB.6
N$43
  Top 0.305: R53.1 2.48,90.93 C38.1
N$44
  Top 0.305: R63.2 17.3,88.83 15.9,90.23 MODRING.9
N$45  (via drill 0.35)
  Top 0.254: C42.1 9.46,94.8 v9.27,94.62 | v5.97,92.46 6.1,92.33 MODRING.16
  Top 0.305: R60.1 C42.1
  Bottom 0.254: v9.27,94.62 6.6,94.62 5.97,93.98 v5.97,92.46
N$46
  Top 0.305: C42.2 R57.1
N$47
  Top 0.305: C36.1 37.82,10.1 39.5,8.42 41.72,8.42 43.18,6.96 VCA.3 43.18,3.74 R50.1
N$48
  Top 0.305: R89.2 50.93,32.96 RED1.A
N$49
  Top 0.305: XMOD.P$1 15.84,97.32 3.18,97.32 2.48,96.62 R57.2
N$50
  Top 0.305: XIN.P$1 3.17,87.7 C38.2
N$51
  Top 0.305: R61.2 14.03,91.34 13.72,91.03 MODRING.10 13.72,88.18 13.2,87.66 11.94,87.66 11.18,88.43 MODRING.12
N$52
  Top 0.305: R91.2 RED2.A
N$53
  Top 0.305: R92.2 87.7,85.79 88.9,84.58 89.53,84.58 89.6,84.52 5V.A
N$54
  Top 0.305: -15V.C 92.04,83.91 93.91,85.79 R93.2
N$55
  Top 0.305: R94.2 98.23,85.66 96.77,84.2 96.52,84.2 96.36,84.04 +15V.A
N$56
  Top 0.305: R90.2 41.97,53.15 41.15,52.32 41.15,51.43 40.86,51.15 GREEN.A
N$57
  Top 0.406: R95.2 3V3.A
N$58  (via drill 0.35)
  Top 0.254: F446.16 45.61,50.02 44.07,51.56 44.07,56.9 v43.56,57.4
  Bottom 0.254: v43.56,57.4 43.69,57.53 44.32,57.53 45.09,58.29 45.09,64.9 43.43,66.55 ANAIN.2
N$59  (via drill 0.35)
  Top 0.254: v40.13,62.86 38.35,64.64 ANAIN.1 | v42.42,57.4 43.49,56.33 43.49,50.7 45.48,48.71 F446.17
  Bottom 0.254: v40.13,62.86 40.13,59.69 v42.42,57.4
N$65
  Top 0.305: R30.2 C21.2
N$69
  Top 0.305: C17.2 R29.2
N$70
  Top 0.305: C22.2 R31.2
N$74
  Top 0.305: R41.2 C30.2
N$75
  Top 0.305: R40.2 C29.2
N$76
  Top 0.305: C31.2 R42.2
N$77
  Top 0.305: C32.2 R43.2
N$78
  Top 0.305: R33.2 C18.2
N$79
  Top 0.305: C23.2 R35.2
N$80
  Top 0.305: R34.2 C20.2
N$81
  Top 0.305: C24.2 R36.2
N$104
  Top 0.254: R80.2 55.69,54.12
  Top 0.406: 55.69,54.12 Q1.1
  Bottom 0.406: Q1.1 C56.2
N$108
  Top 0.61: TLV75533.5 63.77,59.76 R87.2
N$109
  Top 0.813: R87.1 L1.1
N$116
  Top 0.305: C41.1 79.82,49.75 77.92,47.85 R59.1
N$171
  Top 0.305: C12.2 10.57,60.14 12.47,62.04 R23.2
N$172
  Top 0.305: C14.1 21.34,65.47 21.34,64.07 20.83,63.56 R20.2
N$173
  Bottom 0.305: 3340B.1 10.67,44.15 TEMCOB.A
N$174
  Top 0.305: TEMCOB.E 8.51,46.57 10.57,44.51 R11.1
  Bottom 0.305: TEMCOB.E 5.59,46.57 TEMCOB.S
N$175
  Top 0.305: C11.1 R21.2
N$176
  Top 0.305: 3340B.8 R14.2
N$301
  Top 0.305: C13.2 10.57,29.4 12.47,31.3 R24.2
N$302
  Top 0.305: C15.1 20.83,33.59 R22.2
N$303
  Bottom 0.305: 3340A.1 10.67,13.41 TEMCOA.A
N$304
  Top 0.305: TEMCOA.E 8.51,15.83 10.57,13.78 R12.1
  Bottom 0.305: TEMCOA.E 5.59,15.83 TEMCOA.S
N$306
  Top 0.305: 3340A.8 R15.2
N$307
  Top 0.305: 3340A.6 23.37,17.04 26.16,14.25 C4.2
NRST
  Top 0.305: RST.1 48.84,58.95 | 48.84,58.95 47.3,57.41 R79.2 48.32,56.39 49.02,55.69 49.02,53.5 49.77,52.75 C55.2 51.39,52.75 51.94,52.2 51.93,52.18 F446.7 | RST.2 48.84,58.95
  Bottom 0.305: RST.1 54.18,54.38 54.18,37.04 57.17,34.05 58.7,34.05 STLINK.3
OSC_IN
  Top 0.305: R80.1 53.74,52.98 52.93,52.17 F446.5
OSC_OUT
  Top 0.254: Q1.2 52.44,56.82
  Top 0.305: 52.44,56.82 52.43,56.81 F446.6
  Bottom 0.406: Q1.2 C57.2
OUT1_VCF
  Top 0.305: R62.1 R64.2 76.96,42.67 76.33,42.04 76.33,32.26 76.96,31.62 VCF1.7
OUT2_VCF  (via drill 0.35)
  Top 0.305: R67.2 VCF1.6 v88.27,39.75 | R70.2 v96.65,44.32 | ADG453.3 94.87,55.12 97.41,52.58 v97.41,49.15
  Bottom 0.305: v96.65,44.32 97.41,45.09 v97.41,49.15 96.18,49.15 93.91,46.88 93.91,42.6 91.82,40.51 89.03,40.51 v88.27,39.75
OUT3_VCF
  Top 0.305: VCF1.15 89.69,39.24 87.12,41.81 87.12,48.13 88.08,49.09 R74.2
  Top 0.406: R76.2 VCF1.15
OUT4_VCF  (via drill 0.35)
  Top 0.305: VCF1.10 86.49,26.54 85.6,27.43 85.6,35.81 v86.87,37.08 | v86.61,55.12 ADG453.14
  Top 0.406: R78.2 91.19,25.65 VCF1.10
  Bottom 0.305: v86.87,37.08 86.87,38.14 86.27,38.74 86.27,41.62 86.23,41.66 86.23,54.74 v86.61,55.12
OUT_JACK
  Bottom 0.305: C50.- 87.82,5.4 92.32,5.4 96.89,9.97 JACK.3 JACK.2
OUT_MIXER
  Top 0.305: R48.2 C35.2 81.59,78.32
  Top 0.406: 81.59,78.32 81.59,74.11 82.93,72.77 ITOV.6
  Bottom 0.305: MIXOUT.P$1 ITOV.6
OUT_OPAMP
  Bottom 0.305: R69.1 C46.1 79.82,7.87 78.36,7.87 77.98,8.25 77.6,8.25 | 77.6,8.25 74.8,8.25 SUM_OPAMP.6 | 77.6,8.25 79.19,9.84 R73.2
OUT_POT
  Bottom 0.305: R73.1 84.71,11.05 C50.+ 87.76,9.02 89.03,7.75 R75.2 R75.3
OUT_VCF
  Top 0.305: C44.2 83,58.99 82.42,59.56 VCF_OUT.P$1 75.44,56.9 75.44,54.74 75.44,30.61 76.96,29.08 R55.2
PULSE_3340A
  Top 0.305: 3340A.4 18.29,14.5 19.46,13.33 SQU_A.P$1 19.81,13.08 19.81,10.12 | R8.2 19.81,10.12 | 19.81,10.12
PULSE_3340B
  Top 0.305: 3340B.4 18.29,45.24 19.46,44.07 SQU_B.P$1 19.81,43.81 19.81,40.85 | R7.2 19.81,40.85 | 19.81,40.85
RES_CUR_IN_VCF
  Top 0.406: VCF1.8 R55.1
RES_CUR_VCF
  Top 0.305: VCF1.9 77.6,26.54 76.83,25.78 76.83,19.13 Q_TM.A
SAW_3340A
  Top 0.305: R15.1 28.45,8.25 SAW_A.P$1
SAW_3340B
  Top 0.305: R14.1 28.45,39.75 SAW_B.P$1
SCALE_3340A
  Top 0.305: R19.1 3340A.14
SCALE_3340B
  Top 0.305: R18.1 3340B.14
SCL  (via drill 0.35)
  Top 0.305: 69.47,42.04 v69.98,42.54 | 69.47,42.04 68.96,42.04 65.68,42.04 61.14,46.57 F446.61 | I2C.2 69.6,35.43 69.6,42.04 69.47,42.04
  Bottom 0.305: v69.98,42.54 70.87,43.43 24C04.6 68.07,49.66 R84.1
SDA
  Top 0.305: 70.55,44.01 24C04.5 | I2C.1 72.14,35.43 72.14,42.42 70.55,44.01 | F446.62 61.52,47.07 64.59,44.01 70.55,44.01
  Bottom 0.305: R88.1 73.41,50.04 24C04.5
SOFT_SYNC_3340A
  Top 0.305: C10.2 3340A.9
SOFT_SYNC_3340B
  Top 0.305: C9.2 3340B.9
SUB_IN
  Top 0.305: SUB.3 10.16,73.71 9.08,72.63 4.94,72.63 SUB_IN.P$1
SUB_OUT2  (via drill 0.35)
  Top 0.305: SUB2.P$1 6.58,75.44 SUB.1 7.62,76.58 v8,76.96 | v11.43,78.87 SUB.13
  Bottom 0.305: v8,76.96 9.91,78.87 v11.43,78.87
SUB_OUT4
  Top 0.305: SUB.15 8.89,81.74 8.51,82.12 4.39,82.12 3.17,80.9 SUB4.P$1
SW1  (via drill 0.35)
  Top 0.305: v51.56,40.77 50.93,40.14 F446.40
  Bottom 0.305: v51.56,40.77 51.56,29 54.15,26.42 66.22,26.42 68.96,23.68 R85.2 69.21,21.34 70.99,19.56 C63.1
SW2  (via drill 0.35)
  Top 0.305: v50.42,40.77 50.42,38.63 F446.39
  Bottom 0.305: C64.1 R86.2 59.31,24.38 58.55,25.15 53.85,25.15 50.42,28.58 v50.42,40.77
SWCLK
  Top 0.305: F446.49 59.63,40.57 60.27,39.93 STLINK.4
SWDIO
  Top 0.305: STLINK.2 57.48,38.16 55.59,40.06 54.28,40.06 53.93,39.7 F446.46
SYNC_3340A
  Top 0.305: SYNC_A.P$1 13.75,5.17 24.38,5.17 25.33,6.12 R27.2 25.33,6.32 26.29,7.28 26.29,11.75 C4.1
TEMPCO2_VCOA
  Top 0.305: 3340A.2 R17.1
TEMPCO2_VCOB
  Top 0.305: 3340B.2 R16.1
TIMING_CAP_3340A
  Top 0.305: C8.2 24,25.91 3340A.11
TIMING_CAP_3340B
  Top 0.305: C7.2 24,56.64 3340B.11
TRI_3340A
  Bottom 0.305: TRI_A.P$1 28.19,34.92 25.91,32.64 3340A.10
TRI_3340B
  Bottom 0.305: TRI_B.P$1 26.54,56.64 3340B.10
USART1_RX  (via drill 0.35)
  Top 0.305: F446.59 55.39,45.57 v54.99,45.97
  Bottom 0.305: v54.99,45.97 71.5,62.48 MIDI.1
USART1_TX  (via drill 0.35)
  Top 0.305: F446.58 v58.41,45.07 v58.42,45.09
  Bottom 0.305: v58.42,45.09 73.28,59.94 MIDI.2
VCA_IN
  Top 0.305: R49.1 33.21,11.96 34.42,10.76 VCA_IN.P$1
VCAP1
  Top 0.305: F446.30 43.96,41.57 42.28,43.25 C60.2
VCF_ANASW_IN4
  Top 0.305: ADG453.8 93.21,61.47 93.09,61.58 IN34.2 R66.2
VEE_VCF
  Top 0.305: C40.1 R54.2
  Top 0.406: C40.1 VCF1.13
VEE_VCOA
  Top 0.305: C2.2 10.67,9.34 R12.2 R17.2 13.75,11.88 15.65,13.78 R10.2 3340A.3
VEE_VCOB
  Top 0.305: C1.2 10.67,40.07 R11.2 R16.2 13.75,42.61 15.65,44.51 R9.2 3340B.3

## Text on the board
tNames: SYD.X.REY / INSTR. / 2020